# Altium PCB PCB1.PcbDoc
Units mil, origin at the board's own origin, x right, y up, seen from the top; angles counter-clockwise.
Board outline 2090 x 1445 mil, 2 copper layers (Top Layer, Bottom Layer); 24 components, 13 nets, 51 pads, 0 vias.
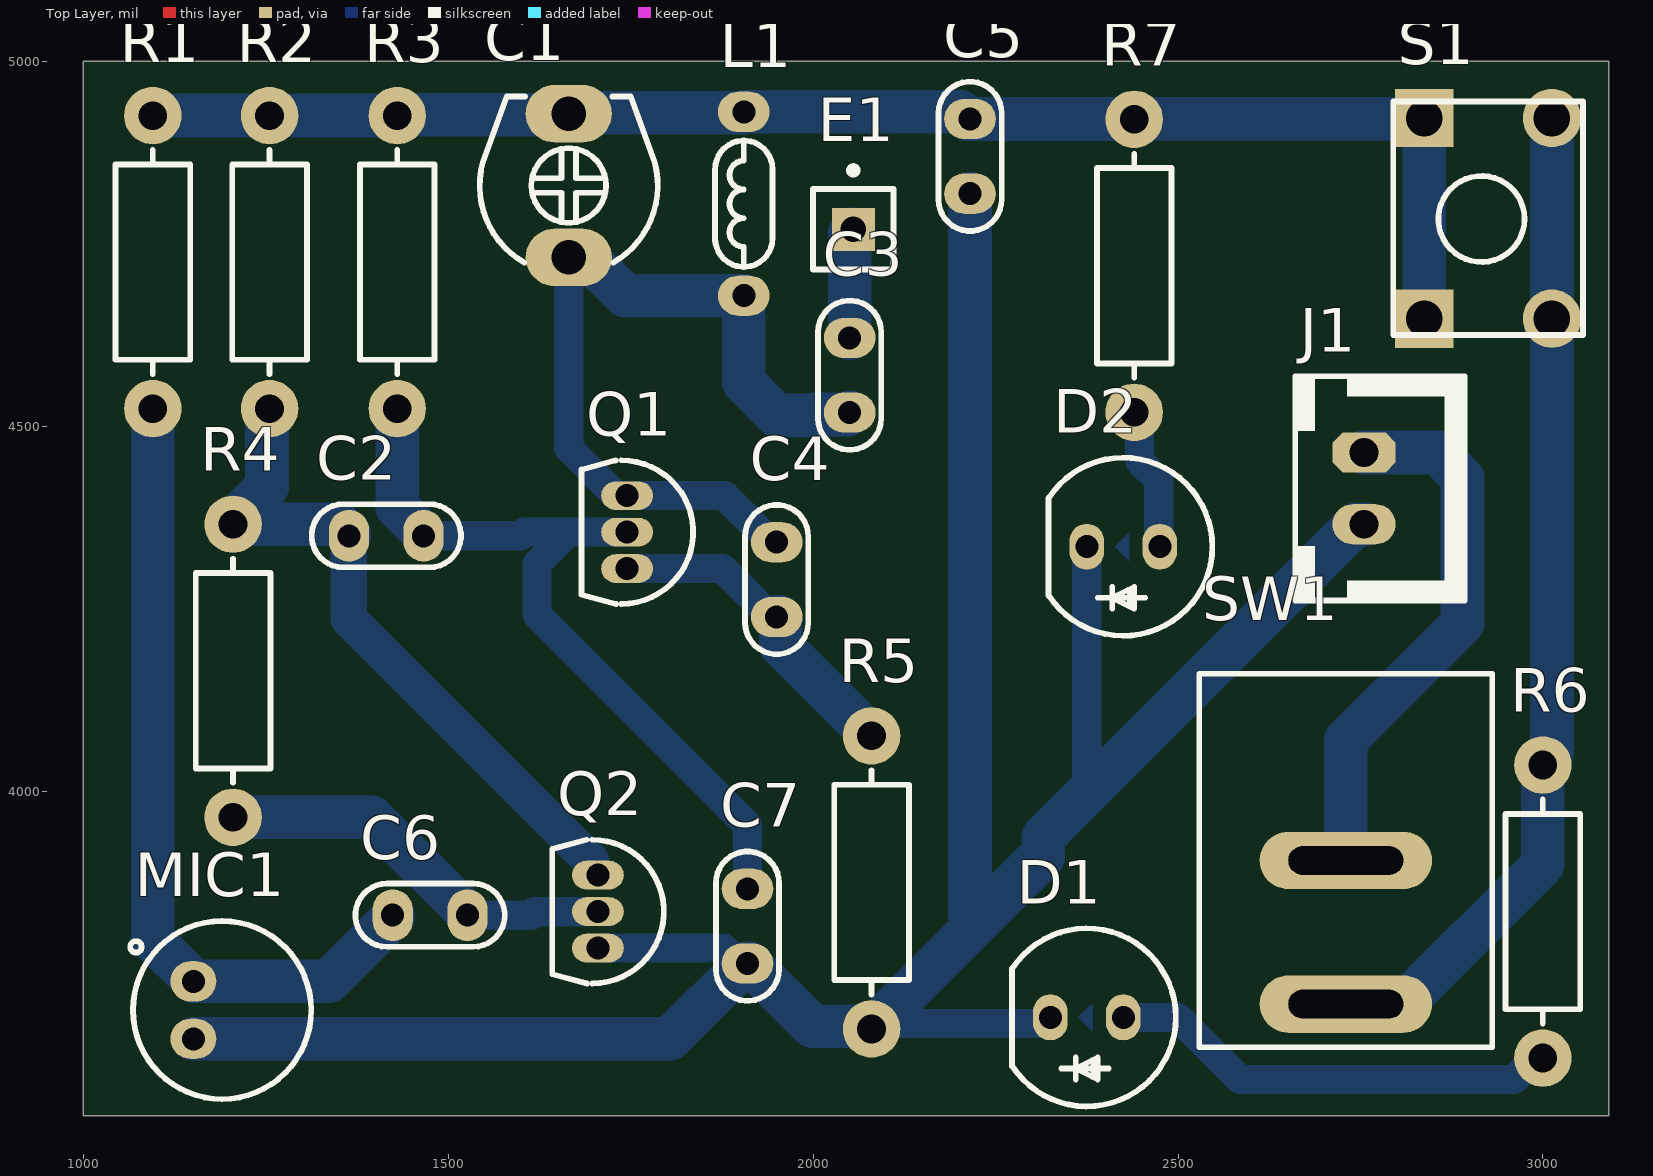
[diagram p0: Top Layer view]
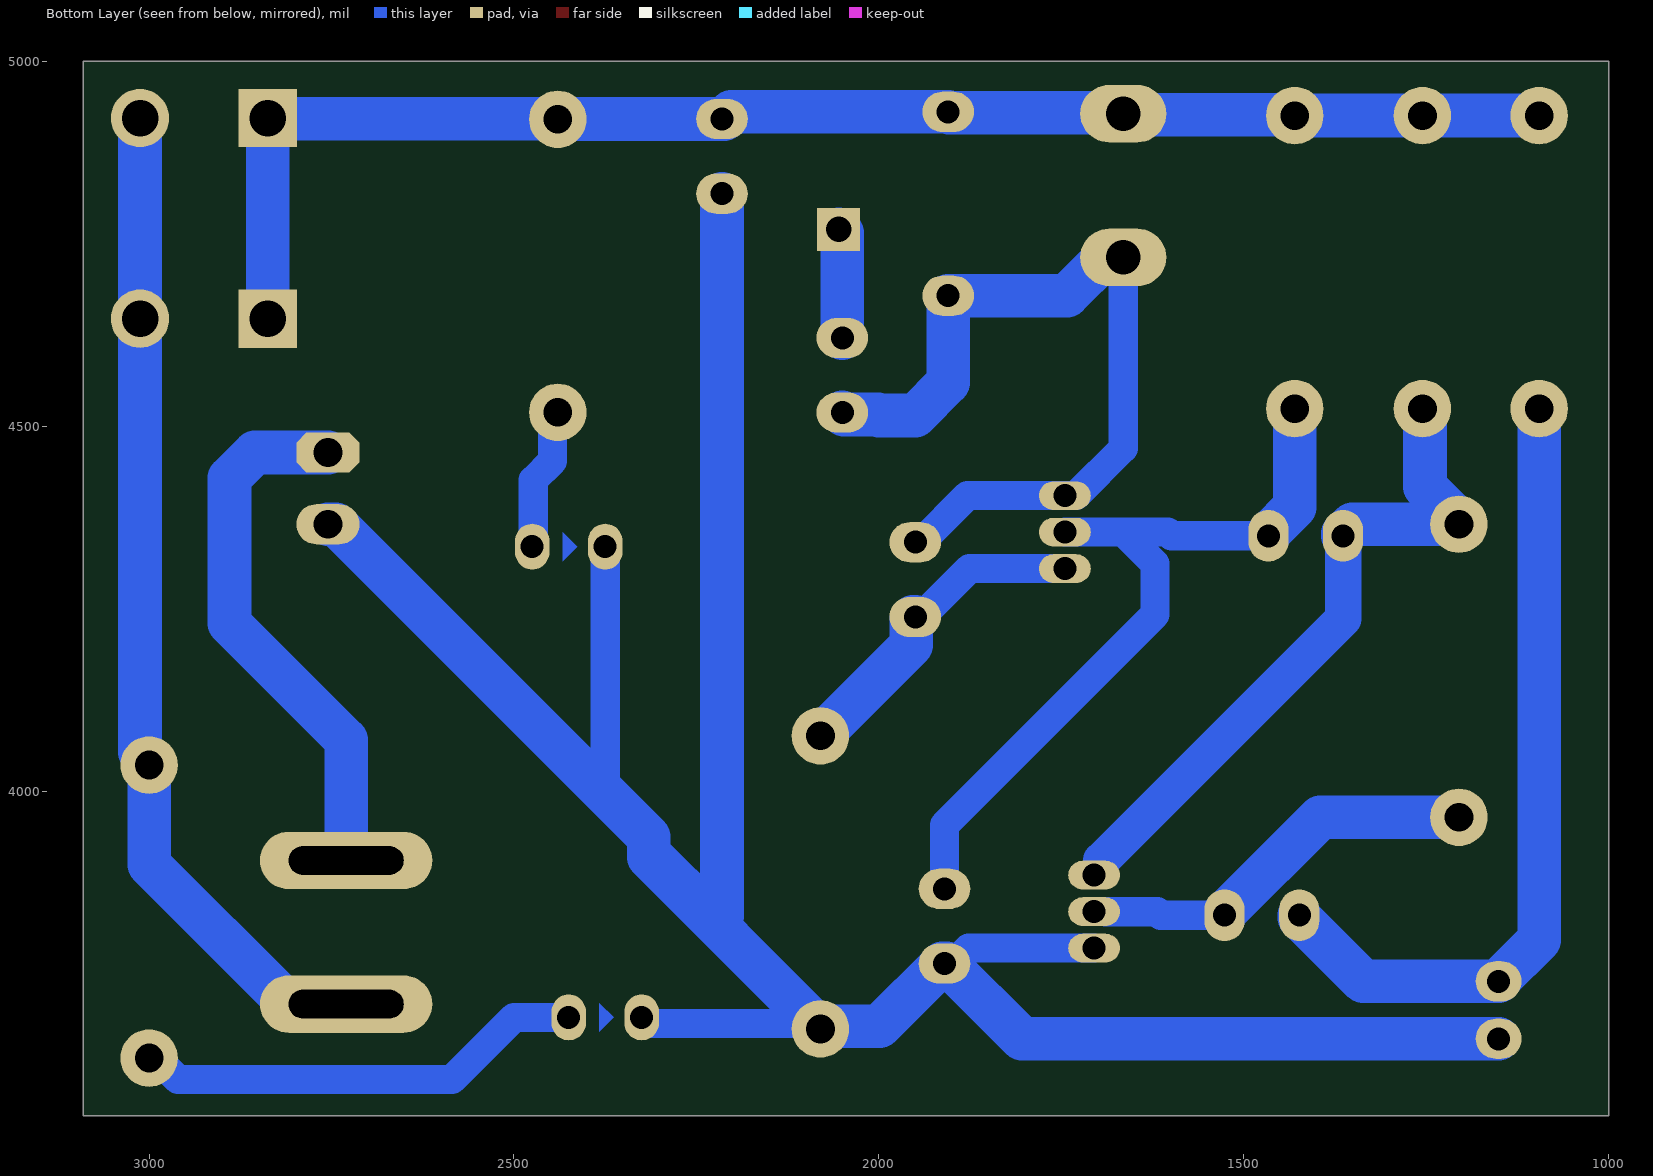
[diagram p1: Bottom Layer view, seen from below]
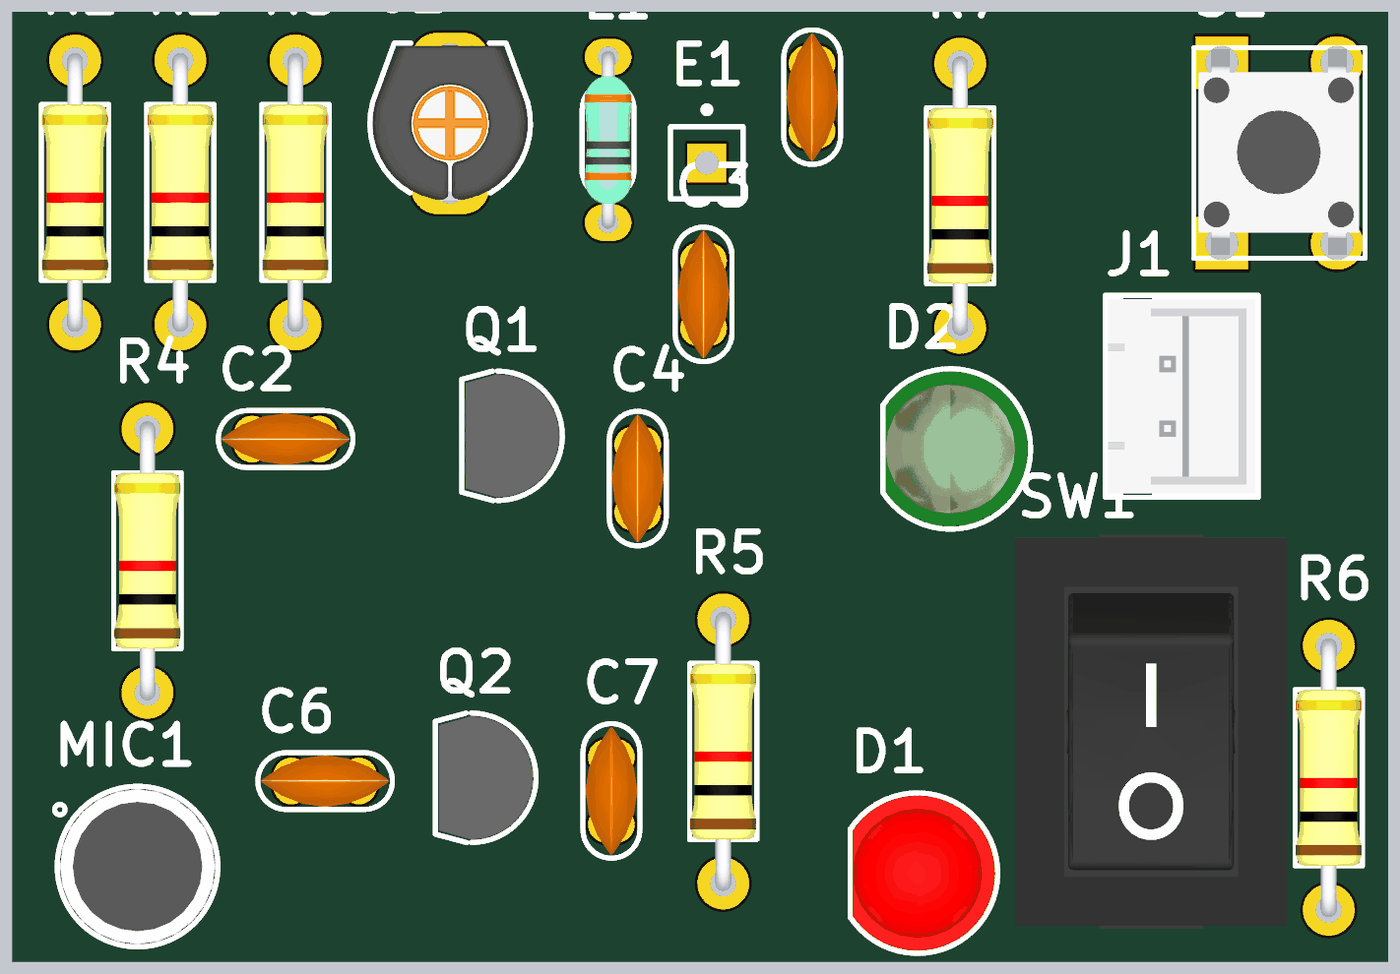
[diagram p2: 3D render of the assembled board from above, using the file's embedded part models]

## Layer stack, top to bottom
Top Solder: solder mask 0.4, Solder Resist, Dk 3.5
Top Layer: signal copper 1.4
Dielectric 1: dielectric 12.6, FR-4, Dk 4.8
Bottom Layer: signal copper 1.4
Bottom Solder: solder mask 0.4, Solder Resist, Dk 3.5

## Board outline
1000,3555 3090,3555 3090,5000 1000,5000

## Design rules (kind name [scope] priority, off if disabled: settings)
Clearance [All] p1: gap=10 ignorepadtopadclearanceinfootprint=FALSE
PolygonConnect [All] p1: connectstyle=Relief reliefconductorwidth=10 reliefentries=4 polygonreliefangle="90 Angle" airgapwidth=10
RoutingVias [All] p1: holewidth=28 width=50 viastyle="Through Hole" minholewidth=28 minwidth=50 maxholewidth=28 maxwidth=50
SolderMaskExpansion [All] p1: expansion=4 istentingtop=FALSE
Width [All] p1: maxlimit=60 minlimit=40 preferedwidth=50
30 further rules are at their usual default settings.

## Components (designator, comment, footprint, x,y, rotation, side; value= is the part's Value field where it differs from the comment)
C1 "60PF" CTRM_6X6 1665,4830 r90 top
C2 "100nF" C_CER_D5 1415,4350 r0 top
C3 "27pF" C_CER_D5 2050,4570 r90 top
C4 "1uF" C_CER_D5 1950,4290 r90 top
C5 "22nF" C_CER_D5 2215,4870 r90 top
C6 "22nF" C_CER_D5 1475,3830 r0 top
C7 "1nF" C_CER_D5 1910,3815 r90 top
D1 "LED5MM_RED" LED5MM_RED 2375,3690 r180 top
D2 "LED5MM_GRN" LED5MM_GRN 2425,4335 r180 top
E1 "Antenna" PIN1 2055,4770 r0 top
J1 "XH_2" XH_2 2755,4415 r270 top
L1 "0.1uH" LT_AX025 1905,4805 r90 top
MIC1 "MIC_WM-64" MIC_C6 1190,3700 r0 top
Q1 "BC547" TO92_3 1745,4355 r270 top
Q2 "BC547" TO92_3 1705,3835 r270 top
R1 "22K" R025W_AX04 1095,4725 r90 top
R2 "10K" R025W_AX04 1255,4725 r90 top
R3 "43K" R025W_AX04 1430,4725 r90 top
R4 "1M" R025W_AX04 1205,4165 r90 top
R5 "330" R025W_AX04 2080,3875 r90 top
R6 "330" R025W_AX04 3000,3835 r90 top
R7 "330" R025W_AX04 2440,4720 r90 top
S1 "Switch PB" "Switch - Push to On" 2925,4785 r90 top
SW1 "ToggleSwitch" SWRCK_SPST_S_15X10 2730,3905 r90 top

## Footprints (in the part's own frame and the unit in brackets; to place one, negate y for a bottom-side part, rotate by r counter-clockwise, add the part's x,y. Pads: shape width x height; smd on the part's side, far side on the other; paste and mask are expansions set on the pad)
C_CER_D5 [mm] "CAP, CER, D:5mm, pitch: 2.5mm"
  oval 1.4x1.8 hole 0.8: 1(-1.3,0) 2(1.3,0)
  silkscreen extent -2.6,-1.1 2.6,1.1, body extent -2.46,-1 2.46,1, height 5.45
CTRM_6X6 [mm] "CAP, TRIMMER, Murata TZ03"
  oval 2x3 hole 1.2: 1(-2.5,0) 2(2.5,0)
  silkscreen extent -2.68,-3.1 3.1,3.1, body extent -3,-3 3,3, height 4.8
LED5MM_GRN [mm] "LED THD 5MM GREEN"
  oval 1.2x1.6 hole 0.8: 1(-1.27,0) 2(1.27,0)
  Bottom Layer region: -0.2,0.5 -0.2,-0.5 0.3,0
  silkscreen extent -3.1,-3.1 2.6,3.1, body extent -3,-3 2.5,3, height 9.14
LED5MM_RED [mm] "LED THD 5MM RED"
  oval 1.2x1.6 hole 0.8: 1(-1.27,0) 2(1.27,0)
  Bottom Layer region: -0.2,0.5 -0.2,-0.5 0.3,0
  silkscreen extent -3.1,-3.1 2.6,3.1, body extent -3,-3 2.5,3, height 9.14
LT_AX025 [mm] "INDUCTOR, Axial, 6.4mm,"
  oval 1.4x1.8 hole 0.8 mask+0.1: 1(-3.2,0) 2(3.2,0)
  silkscreen extent -2.2,-1 2.2,1, body extent -3.43,-0.92 3.43,0.92, height 1.92
MIC_C6 [mm] "MIC, WM-63PR, POM-3535P-3-R"
  oval 1.6x1.4 hole 0.8: 1(-1,1) 2(-1,-1)
  silkscreen extent -3.2,-3.1 3.1,3.1, body extent -3,-3 3,3, height 2.4
PIN1 [mm] "Generic Antenna; 1 Lead"
  rect 1.5x1.5 hole 0.9: 1(0,0)
  silkscreen extent -1.4,-1.4 1.4,2.17
R025W_AX04 [mm] "RESISTOR 1/4 WATT, AXIAL0.4"
  round 2 hole 1: 1(-5.1,0) 2(5.1,0)
  silkscreen extent -3.9,-1.3 3.9,1.3, body extent -5.38,-1.28 5.38,1.28, height 2.6
"Switch - Push to On" [mil]
  rect 80x80 hole 50: 1(-137.5,87.5) 1(137.5,87.5)
  round 80 hole 50: 2(-137.5,-87.5) 2(137.5,-87.5)
  silkscreen extent -160,-130 160,130, body extent -155,-121 157,123, height 205
SWRCK_SPST_S_15X10 [mm] "SWITCH Rocker, SPST, Straight, 15x10"
  oval 2x6 hole 1 slot 4 at 90 deg: 1(-5,0) 2(0,0)
  silkscreen extent -6.5,-5.1 6.5,5.1, body extent -7.6,-5.25 7.6,5.25, height 13.1
TO92_3 [mm] "TO-92, SOT54"
  oval 1x1.8 hole 0.8 mask+0.1: 1(-1.27,0) 2(0,0) 3(1.27,0)
  silkscreen extent -2.5,-1.59 2.5,2.3, body extent -2.38,-1.45 2.38,2.18, height 7.82
XH_2 [mm] "PW10-x-M, JST-BxB-XH-A pitch: 2.5mm, 3A/250v"
  oct 1.4x2.2 hole 1: 1(-1.25,0)
  oval 1.4x2.2 hole 1: 2(1.25,0)
  silkscreen extent -3.9,-2.4 3.9,3.5, body extent -3.75,-2.3 3.75,3.4, height 7

## Part data
C1: library part CAP_THD_TRIMMER, "CAP, THD, TRIMMER", ASSEMBLY=ASSEMBLY, DESC="CAP, SMD, TRIMMER", MANF=MANF, MANF_P#=MANF_PART#, PARAM=PARAM, PARAM2=PARAM2, PRICE="100= 1$"
C2 C3 C4 C5 C6 C7: library part CAP_THD_CER, "CAP, THD, CER MULTI LAYER,", ASSEMBLY=ASSEMBLY, DESC="CAP, CER MULTI LAYER,", MANF=MANF, MANF_P#=MANF_PART#, PARAM2=50V, PRICE="100= 1$"
D1: library part LED_THD_5MM_RED, "LED, THD, 5MM, RED", ASSEMBLY=ASSEMBLY, DESC=DESCRIPTION, MANF=MANF, MANF_P#=MANF_PART#, PARAM2=2.2V, PRICE=PRICE
D2: library part LED_THD_5MM_GRN, "LED, THD, 5MM, GREEN", ASSEMBLY=ASSEMBLY, DESC=DESCRIPTION, MANF=MANF, MANF_P#=MANF_PART#, PARAM2=2.2V, PRICE=PRICE
E1: "Generic Antenna", LatestRevisionDate=17-Jul-2002, LatestRevisionNote="Re-released for DXP Platform.", PackageReference=PIN1, Published=24-Mar-1999, Publisher="Altium Limited"
J1: "PW10-x-M, JST-BxB-XH-A pitch: 2.5mm, 3A/250v", MANF=JST, MANF_P#=B2B-XH-A, PARAM=3.0A, PARAM2=250v
L1: library part IND_THD, "INDUCTOR, THD"
MIC1: "MICROPHONE OMNI 6X2.2MM W/CAP 2.2KOHM -44DB TH", MANF_P#=WM-64PNT, PRICE=PRICE
Q1 Q2: library part NPN_BC547_TO92, "BJT, NPN, 45v, 0.1A, THD, TO92", MANF=FAIRCHILD, MANF_P#=BC547, PARAM="0.1A, Hfe110~800", PARAM2="45v, 500mW"
R1 R2 R3 R4 R5 R6 R7: library part RES_THD, "RESISTOR, THD", ASSEMBLY=ASSEMBLY, DESC=DESCRIPTION, DIST#=MOUSER, MANF="KOA SPEER", MANF_P#=RK73H1ETTP4701F, PARAM=0.063W, PARAM2=1%, PRICE="100= 0.5$"
S1: "Push Button Switch"
SW1: library part SWROK_SPST_R_15X10, "SWITCH, Rocker, SPST, THD, 15x10.5mm", ASSEMBLY=ASSEMBLY, DESC=DESCRIPTION, MANF=-, MANF_PART#=-, PARAM=-, PRICE=-

## Nets (pads, with @x,y where several pads share a name; then routed paths per layer and width w, separated by ;. In a path a pad name is that pad's centre, name@x,y a point inside that pad or via, vN(x,y) a via of type N, cw(c..) or ccw(c..) an arc to the next point about the centre after c; other vN are vias at no path point)
GND: C5.1 C7.1 D1.2 D2.2 J1.2 MIC1.2 Q2.3 R5.1 | length 3905.4
  Bottom Layer w40: Q2.3 1876.85,3785 1898.04,3763.82 1907.01,3763.82 C7.1 ; R5.1@2087.41,3681.63 2321.65,3681.63 2325,3684.97 D1.2 ; 2215,3828.89 2315.35,3929.25 ; 2375,4003.03 D2.2
  Bottom Layer w60: MIC1.2 1803.82,3660.63 C7.1@1907.01,3763.82 ; C7.1 1912.99,3763.82 1999.01,3677.8 2076.41,3677.8 R5.1 2087.41,3681.63 2315.35,3909.57 2315.35,3929.25 2315.35,3937.01 2744.13,4365.79 J1.2 ; 2215,3828.89 C5.1
NetC1_1: C1.1 C3.1 C4.2 L1.1 Q1.1 | length 1146
  Bottom Layer w40: C1.1 1665,4469.88 1729.88,4405 Q1.1 1878.31,4405 1942.13,4341.18 C4.2
  Bottom Layer w60: C1.1 1689.76,4731.57 1742.32,4679.02 L1.1 1905,4560 1950,4515 1999.71,4515 2001.08,4516.38 2047.56,4516.38 C3.1
NetC1_2: C1.2 C5.2 L1.2 R1.2 R2.2 R3.2 R7.2 S1.1 | length 2024.6
  Bottom Layer w60: R1.2 R2.2 R3.2 1431.32,4927.11 1663.68,4927.11 C1.2 1666.28,4929.7 1903.72,4929.7 L1.2 2202.2,4930.98 2212.01,4921.18 C5.2 2215.2,4920.98 2439.8,4920.98 R7.2 2440.86,4921.64 2836.64,4921.64 2837.5,4922.5 S1.1@2837.5,4647.5
NetC2_1: C2.1 Q2.1 R2.1 R4.2 | length 928.4
  Bottom Layer w50: C2.1 1363.82,4236.18 1695,3905
  Bottom Layer w60: R2.1 1251.41,4520.63 1251.41,4417.27 1205,4370.86 R4.2 1351.02,4365.79 1363.82,4352.99 C2.1
NetC2_2: C2.2 C7.2 Q1.2 R3.1 | length 1096.4
  Bottom Layer w40: C2.2 1599.02,4350 1604.02,4355 1665,4355 ; Q1.2 1665,4355 ; C7.2 1910,3953.74 1621.57,4242.17 1621.57,4311.57 1665,4355
  Bottom Layer w60: R3.1 1430,4389.17 1466.18,4352.99 C2.2
NetC3_2: C3.2 E1.1 | length 150.9
  Bottom Layer w60: C3.2 2050,4765 E1.1
NetC4_1: C4.1 Q1.3 R5.2 | length 451
  Bottom Layer w40: Q1.3 1875.94,4305 1942.13,4238.82 C4.1
  Bottom Layer w60: C4.1 1952.99,4238.82 1955.43,4236.38 1955.43,4200.35 R5.2
NetC6_1: C6.1 MIC1.1 R1.1 | length 1120.4
  Bottom Layer w60: R1.1 1095,3795.94 1150.63,3740.31 MIC1.1 1336.18,3739.37 1423.82,3827.01 C6.1
NetC6_2: C6.2 Q2.2 R4.1 | length 559.4
  Bottom Layer w40: C6.2 1613.74,3830 1618.43,3834.69 1689.57,3834.69 1689.88,3835 Q2.2
  Bottom Layer w60: R4.1 1394.96,3964.21 1526.18,3832.99 C6.2
NetD1_1: D1.1 R6.1 | length 622.3
  Bottom Layer w40: D1.1 2500,3690 2585,3605 2960.3,3605 2989.52,3634.21 R6.1
NetD2_1: D2.1 R7.1 | length 198.7
  Bottom Layer w40: R7.1 2447.41,4511.8 2447.41,4452.42 2473.61,4426.22 2473.61,4336.39 D2.1
NetR6_2: R6.2 S1.2 SW1.1 | length 1456.2
  Bottom Layer w40: SW1.1@2651.26,3708.15 SW1.1
  Bottom Layer w60: SW1.1 2808.74,3708.15 3000,3899.41 R6.2 3000,4040.86 3012.5,4053.36 3012.5,4647.5 S1.2@3012.5,4922.5
VCC: J1.1 SW1.2 | length 739.9
  Bottom Layer w60: SW1.2 2730,4070 2890,4230 2890,4429.07 2854.85,4464.21 J1.1